# EAGLE board Utility Shield 1.2 (EAGLE 7.3.0)
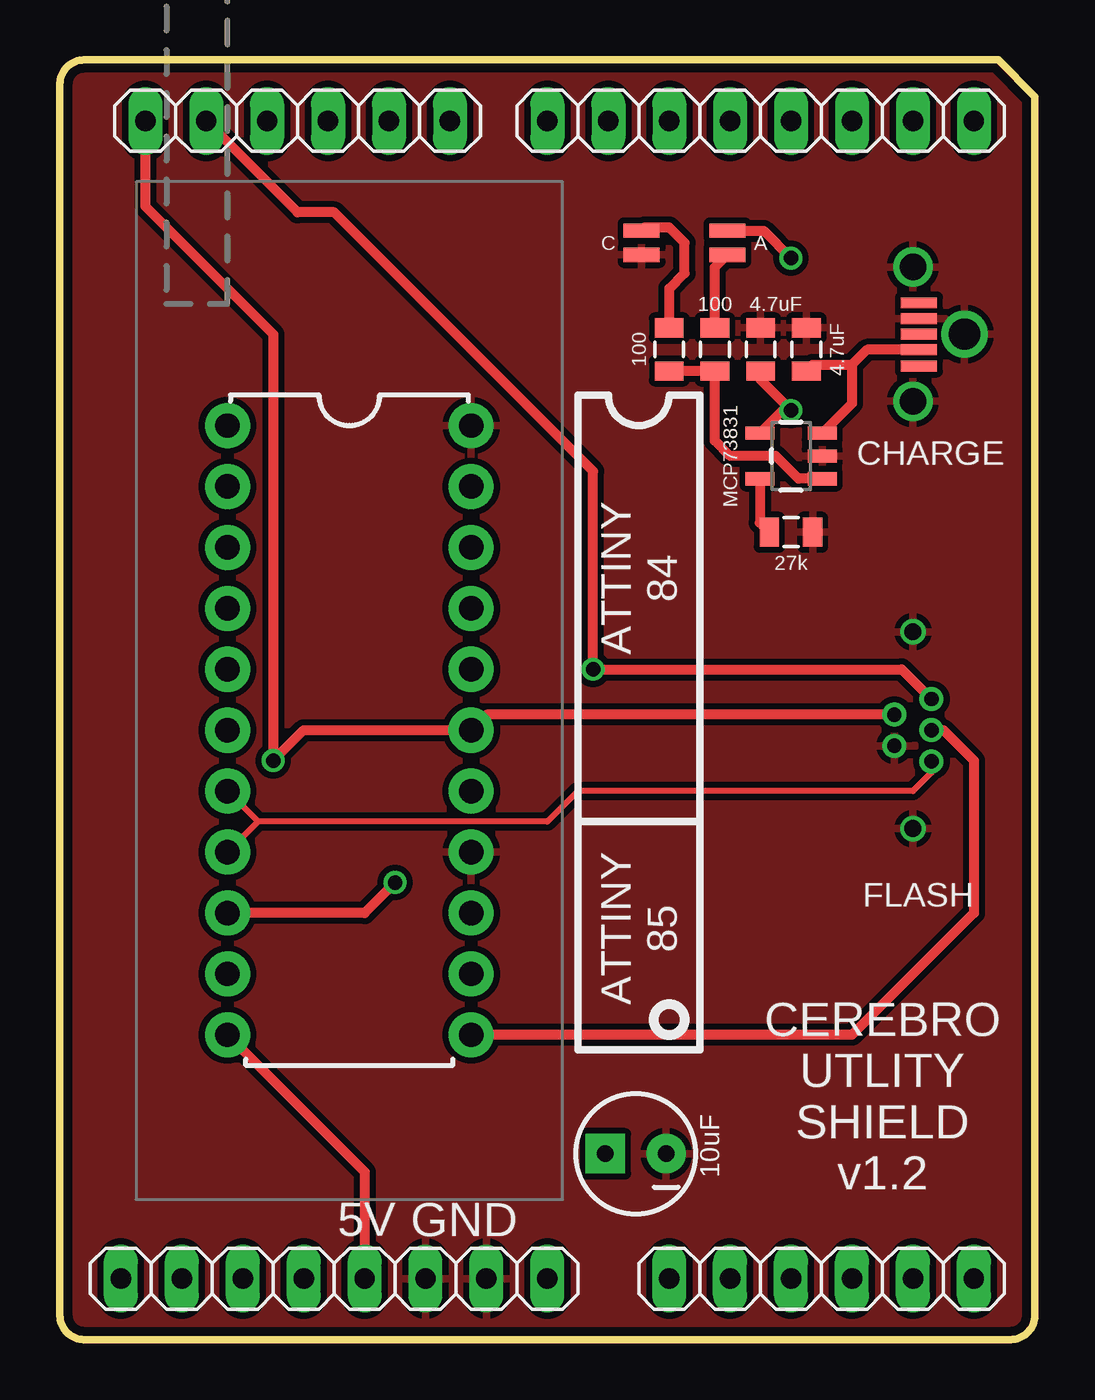
[diagram p0: board, top side]
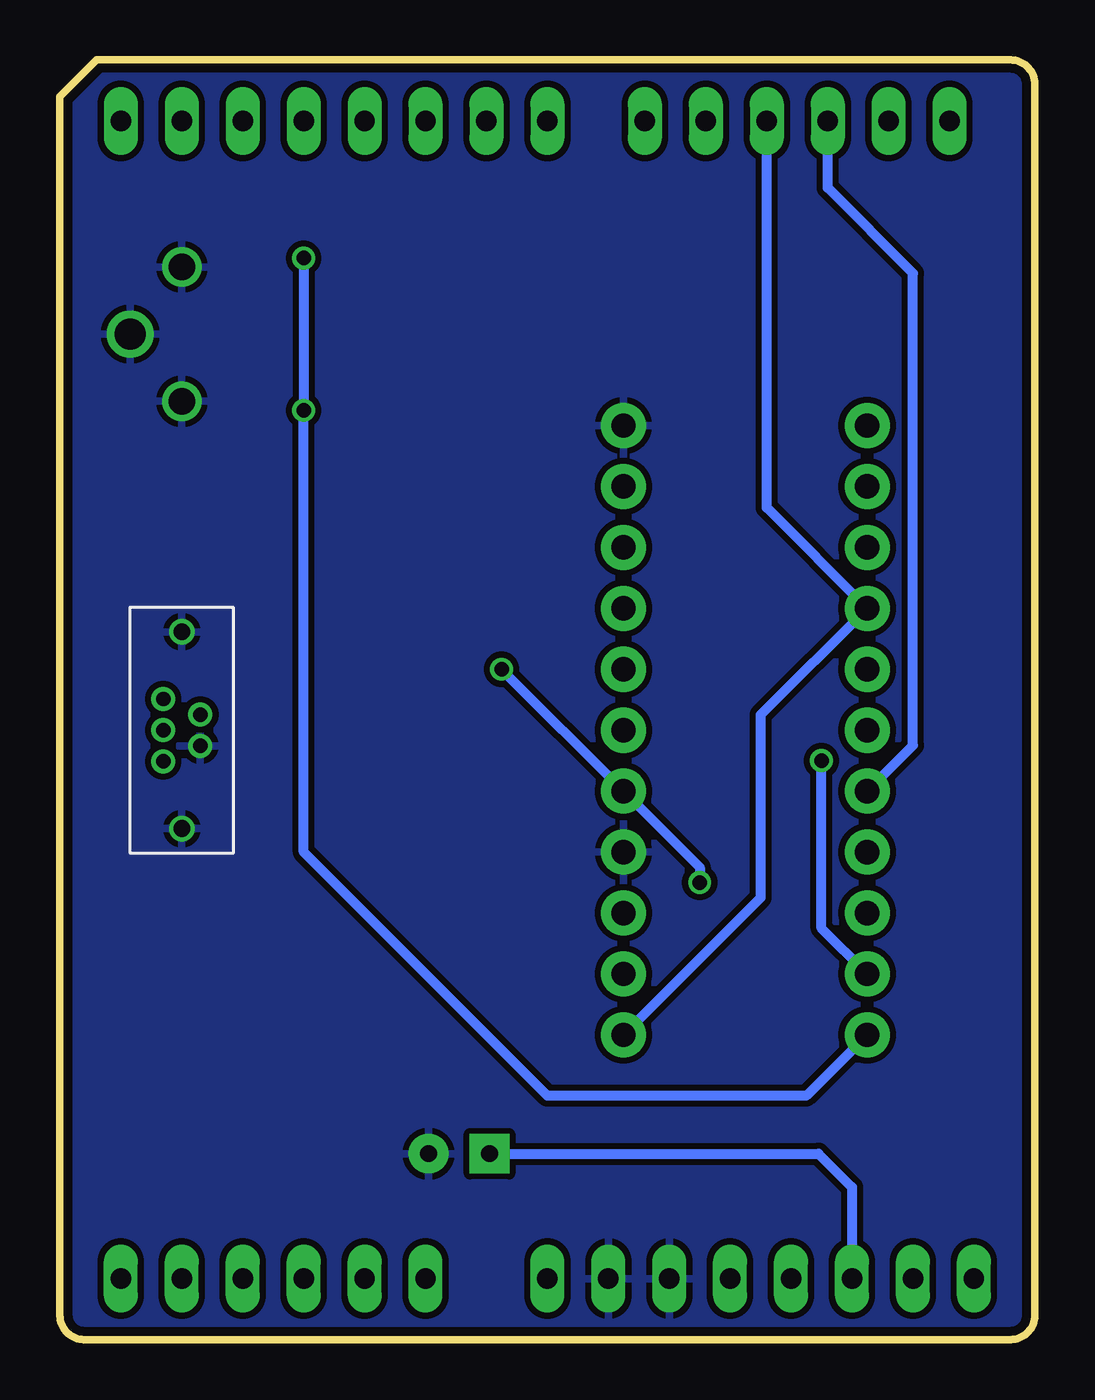
[diagram p1: board, bottom side, seen from below]

Size 40.64 x 53.34 mm. Coordinates in mm from the lower left corner, seen from the top.
Outline: 39.12,53.34 40.64,51.82 40.64,1 arc-90 39.64,0 1,0 arc-90 0,1 0,52.34 arc-90 1,53.34 39.12,53.34
Copper layers (1*16): Top 0.0356mm / dielectric 1.5011mm / Bottom 0.0356mm
Design rules "LaenPCBOrder": minimum track width 6mil, minimum drill 13mil, track to track 6mil, track to pad 6mil, pad to pad 6mil, via to via 6mil, smd to smd 6mil, copper to edge 15mil, drill to drill 6mil, minimum pad ring 7mil, minimum via ring 7mil, stop-mask expansion 3mil, vias tented up to drill 0mil, thermal gap 10mil
Net classes: 0 default: width 0.254 mm, clearance 0.254 mm; 1 power: width 0.61 mm, drill 0.61 mm, clearance 0.254 mm; 2 gnd: width 0.305 mm, drill 0.559 mm, clearance 0.254 mm; 3 usbvcc: width 0.508 mm, drill 0.61 mm, clearance 0.254 mm; 4 aref: width 0.406 mm, drill 0.61 mm, clearance 0.254 mm

## Footprints (pad centres in the part's own frame; a part is rotated, then mirrored left to right if it is on the bottom)
1X06 = drill 0.85 pad 1.422 long: 1 -6.35,0; 2 -3.81,0; 3 -1.27,0; 4 1.27,0; 5 3.81,0; 6 6.35,0
CPOL-RADIAL-10UF-25V = drill 0.7 pad 1.651 square: 1 1.27,0 | drill 0.7 pad 1.651: 2 -1.27,0
0805 = smd 0.8 x 1.2: 1 -0.9,0; 2 0.9,0
1X08 = drill 0.85 pad 1.422 long: 1 -8.89,0; 2 -6.35,0; 3 -3.81,0; 4 -1.27,0; 5 1.27,0; 6 3.81,0; 7 6.35,0; 8 8.89,0
MICRO-B-TH = drill 0.6 pad 1: 1 1.3,-0.775; 2 0.65,0.775; 3 0,-0.775; 4 -0.65,0.775; 5 -1.3,-0.775 | drill 0.7: P$1 -4.1,0; P$2 4.1,0
SOT23-5 = smd 0.55 x 1.2: 1 -0.95,-1.3; 2 0,-1.3; 3 0.95,-1.3; 4 0.95,1.3; 5 -0.95,1.3
ZIF_22 = drill 1.016 pad 1.88: 1 -12.7,-5.08; 2 -10.16,-5.08; 3 -7.62,-5.08; 4 -5.08,-5.08; 5 -2.54,-5.08; 6 0,-5.08; 7 2.54,-5.08; 8 5.08,-5.08; 9 7.62,-5.08; 10 10.16,-5.08; 11 12.7,-5.08; 12 12.7,5.08; 13 10.16,5.08; 14 7.62,5.08; 15 5.08,5.08; 16 2.54,5.08; 17 0,5.08; 18 -2.54,5.08; 19 -5.08,5.08; 20 -7.62,5.08; 21 -10.16,5.08; 22 -12.7,5.08
LED_DUAL = smd 1.499 x 0.597: GA 1.791,-0.502; GC -1.791,-0.502; RA 1.791,0.502; RC -1.791,0.502
USB_VERT_MICRO_SMD = smd 0.45 x 1.5: P1 -1.33,-0.25; P2 -0.65,-0.25; P3 0,-0.25; P4 0.65,-0.25; P5 1.3,-0.25 | drill 1.1: P$1 -2.8,0; P$2 2.8,0 | drill 1.3: P$3 0,-2.15

## Placement (x,y rotation side)
AD  6x1F-H8.5  [1X06]  31.75,2.54 0 top
AD1  6x1F-H8.5  [1X06]  9.91,50.8 180 top
C1  10uF  [CPOL-RADIAL-10UF-25V]  24,7.75 180 top
C2  4.7uF  [0805]  31.11,41.27 90 top
C3  4.7uF  [0805]  29.21,41.27 90 top
IOL  8x1F-H8.5  [1X08]  29.21,50.8 180 top
JP1  USB_MICROB_PLUG-PTH2  [MICRO-B-TH]  35.56,25.4 90 top
POWER  8x1F-H8.5  [1X08]  11.43,2.54 0 top
R1  100  [0805]  27.3,41.27 270 top
R2  100  [0805]  25.4,41.27 270 top
R3  27k  [0805]  30.48,33.66 0 top
U2  MCP73831  [SOT23-5]  30.48,36.83 90 top
U$1  ZIF_22  [ZIF_22]  12.06,25.4 270 top
U$2  LED_DUAL  [LED_DUAL]  26.04,45.72 0 top
U$3  USB_SOCKET_MICRO_VERT  [USB_VERT_MICRO_SMD]  35.56,41.91 90 top

## Library data of the parts
AD AD1 IOL POWER = SmartPrj
C1 = SparkFun-Passives
C2 C3 = SparkFun-Capacitors; PROD_ID: CAP-11625
JP1 R1-R3 U$1-U$3 = Andy-library
U2 = SparkFun-PowerIC; PROD_ID: IC-09995

## Nets
3VDC: POWER.4
5VDC: C3.1 POWER.5 U2.4 U$1.11 U$2.RA
GND: C1.2 C2.2 C3.2 JP1.4 JP1.P$1 JP1.P$2 POWER.6 POWER.7 R3.2 U2.2 U$1.15 U$1.22 U$2.GC U$3.P4 U$3.P$1 U$3.P$2 U$3.P$3
MISO: AD1.5 JP1.1 U$1.9 U$1.16
MOSI: AD1.4 JP1.5 U$1.7 U$1.8
N$1: C1.1 POWER.3
N$3: R1.2 R2.2 U2.1
N$4: R1.1 U$2.GA
N$5: R2.1 U$2.RC
N$6: R3.1 U2.5
N$9: C2.1 U2.3 U$3.P2
RST: AD1.3 JP1.3 U$1.4 U$1.12
SCK: AD1.6 JP1.2 U$1.10 U$1.17

## Tracks (layer width: path | path; a pad name or v marks a point on that pad's centre or on a via)
5VDC  (via drill 0.6)
  Top 0.406: U$1.11 12.7,6.99 POWER.5 | U$2.RA 29.34,46.22 v30.48,45.09 | U2.4 30.14,38.73 v30.48,38.73 29.21,40.01 C3.1
  Bottom 0.406: U$1.11 9.53,10.16 20.32,10.16 30.48,20.32 v30.48,38.73 v30.48,45.09
GND
  pour Bottom: -2.54,54.61 44.45,54.61 44.45,-1.27 -2.54,-1.27
  pour Top: -2.54,54.61 44.45,54.61 44.45,-1.27 -2.54,-1.27
MISO  (via drill 0.6)
  Top 0.406: v13.97,19.05 12.7,17.78 U$1.9 | AD1.5 9.91,46.99 11.43,46.99 22.23,36.2 v22.23,27.94 35.09,27.94 JP1.1
  Bottom 0.406: v22.23,27.94 U$1.16 13.97,19.68 v13.97,19.05
MOSI
  Top 0.254: JP1.5 36.34,23.64 35.56,22.86 21.59,22.86 20.32,21.59 8.26,21.59 | 8.26,21.59 U$1.7 | 8.26,21.59 U$1.8
  Bottom 0.406: U$1.7 5.08,24.77 5.08,44.45 8.64,48.01 AD1.4
N$1
  Bottom 0.406: C1.1 9.02,7.75 7.62,6.35 POWER.3
N$3
  Top 0.406: U2.1 30.8,35.88 29.84,36.83 27.94,36.83 27.3,37.47 R1.2 R2.2
N$4
  Top 0.406: R1.1 27.3,44.7 U$2.GA
N$5
  Top 0.406: R2.1 25.4,43.81 26.04,44.45 26.04,45.72 25.4,46.35 24.38,46.35 U$2.RC
N$6
  Top 0.406: U2.5 29.18,34.05 R3.1
N$9
  Top 0.406: U$3.P2 33.64,41.26 33.02,40.64 | 33.02,40.64 33.02,39.02 U2.3 | C2.1 31.38,40.64 33.02,40.64
RST
  Top 0.406: JP1.3 36.83,25.4 38.1,24.13 38.1,17.78 33.02,12.7 U$1.12
  Bottom 0.406: U$1.12 11.43,18.41 11.43,26.04 U$1.4 11.18,34.67 AD1.3
SCK  (via drill 0.6)
  Top 0.406: JP1.2 17.8,26.05 U$1.17 10.16,25.4 v8.89,24.13 8.89,41.91 3.56,47.24 AD1.6
  Bottom 0.406: U$1.10 8.89,17.14 v8.89,24.13

## Text on the board
tPlace: ATTINY / 85
tNames: CHARGE | ATTINY / 84 | FLASH | CEREBRO / UTLITY / SHIELD / v1.2 | 5V | GND
214bmp: D:/SmartProjects/Snc/a4_bn_logo2.bmp